# EAGLE board ATTinyX4 (EAGLE 6.3)
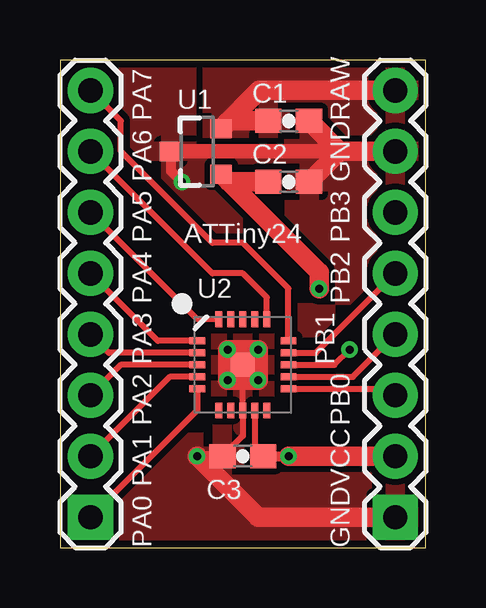
[diagram p0: board, top side]
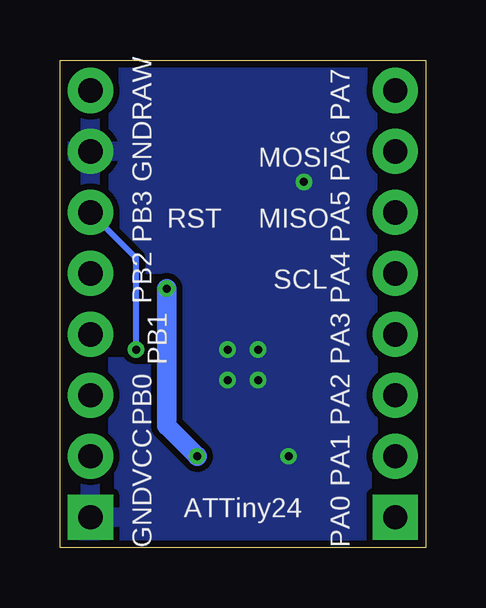
[diagram p1: board, bottom side, seen from below]

Size 15.24 x 20.32 mm. Coordinates in mm from the lower left corner, seen from the top.
Outline: 0,0 15.24,0 15.24,20.32 0,20.32 0,0
Copper layers (1*16): Top 0.0356mm / dielectric 1.5011mm / Bottom 0.0356mm
Design rules "LaenPCBOrder *": minimum track width 6mil, minimum drill 13mil, track to track 6mil, track to pad 6mil, pad to pad 6mil, via to via 6mil, smd to smd 6mil, copper to edge 12mil, drill to drill 6mil, minimum pad ring 7mil, minimum via ring 7mil, stop-mask expansion 4mil, vias tented up to drill 0mil, thermal gap 10mil

## Footprints (pad centres in the part's own frame; a part is rotated, then mirrored left to right if it is on the bottom)
0603-CAP = smd 1.1 x 1: 1 -0.85,0; 2 0.85,0
1X08 = drill 1.016 pad 1.88 square: 1 0,0 | drill 1.016 pad 1.88: 2 2.54,0; 3 5.08,0; 4 7.62,0; 5 10.16,0; 6 12.7,0; 7 15.24,0; 8 17.78,0
SOT23-3 = smd 0.8 x 0.9: 1 -0.95,-1; 2 0.95,-1; 3 0,1.1
QFN20 = smd 1 x 1: 0 0,0 | smd 0.65 x 0.3: 1 -1.9,1; 2 -1.9,0.5; 3 -1.9,0; 4 -1.9,-0.5; 5 -1.9,-1; 11 1.9,-1; 12 1.9,-0.5; 13 1.9,0; 14 1.9,0.5; 15 1.9,1 | smd 0.3 x 0.65: 6 -1,-1.9; 7 -0.5,-1.9; 8 0,-1.9; 9 0.5,-1.9; 10 1,-1.9; 16 1,1.9; 17 0.5,1.9; 18 0,1.9; 19 -0.5,1.9; 20 -1,1.9

## Placement (x,y rotation side)
C1  0.1uF  [0603-CAP]  9.53,17.78 0 top
C2  0.1uF  [0603-CAP]  9.53,15.24 0 top
C3  0.1uF  [0603-CAP]  7.62,3.81 0 top
JP1  HEADER_A  [1X08]  1.27,1.27 90 top
JP2  HEADER_B  [1X08]  13.97,1.27 90 top
U1  LM3480IM4  [SOT23-3]  5.71,16.51 90 top
U2  ATTINY24QFN  [QFN20]  7.62,7.62 0 top

## Library data of the parts
C1-C3 = SparkFun-Capacitors
JP1 JP2 = SparkFun-Connectors
U1 = SparkFun-PowerIC
U2 = SparkFun-DigitalIC

## Nets
GND: C1.2 C2.2 C3.1 JP2.1 JP2.7 U1.3 U2.0 U2.8
PA0: JP1.1 U2.5
PA1: JP1.2 U2.4
PA2: JP1.3 U2.3
PA3: JP1.4 U2.2
PA4: JP1.5 U2.1
PA5: JP1.6 U2.20
PA6: JP1.7 U2.16
PA7: JP1.8 U2.15
PB0: JP2.3 U2.11
PB1: JP2.4 U2.12
PB2: JP2.5 U2.14
PB3: JP2.6 U2.13
RAW: C1.1 JP2.8 U1.2
VCC: C2.1 C3.2 JP2.2 U1.1 U2.9

## Tracks (layer width: path | path; a pad name or v marks a point on that pad's centre or on a via)
GND  (via drill 0.33)
  Top 0.254: C3.1 7.62,4.66 U2.8 U2.0
  Top 0.406: C3.1 v5.71,3.81 | U1.3 4.62,15.71 v5.08,15.24
  Top 0.61: U1.3 11.43,16.51
  Top 0.813: 11.64,16.51 C1.2 | JP2.7 11.64,16.51 | 11.64,16.51 11.54,16.4 | 11.54,16.4 C2.2 | 11.43,16.51 11.54,16.4 | v6.99,8.26 U2.0 | v8.26,8.26 U2.0 | v8.26,6.99 U2.0 | v6.99,6.99 U2.0 | v6.99,8.26 v6.99,6.99 | v6.99,6.99 v8.26,6.99 | v8.26,6.99 v8.26,8.26 | v8.26,8.26 v6.99,8.26 | JP2.1 8.26,1.27 v5.71,3.81
  pour Bottom (isolate 0.254): -1.27,21.59 16.51,21.59 16.51,-1.27 -1.27,-1.27
  pour Top (isolate 0.254, rank 6): -1.27,21.59 16.51,21.59 16.51,-1.27 -1.27,-1.27
PA0
  Top 0.254: U2.5 5.72,5.72 JP1.1
PA1
  Top 0.254: U2.4 4.58,7.12 JP1.2
PA2
  Top 0.254: U2.3 2.54,7.62 JP1.3
PA3
  Top 0.254: U2.2 2.04,8.12 JP1.4
PA4
  Top 0.254: U2.1 4.08,8.62 JP1.5
PA5
  Top 0.254: U2.20 5.72,9.52 JP1.6
PA6
  Top 0.254: U2.16 8.62,10.43 7.62,11.43 6.35,11.43 JP1.7
PA7
  Top 0.254: U2.15 9.52,10.8 7.62,12.7 6.35,12.7 2.54,16.51 2.54,17.78 JP1.8
PB0
  Top 0.254: U2.11 13.7,6.62 JP2.3
PB1
  Top 0.254: U2.12 12.2,7.12 JP2.4
PB2
  Top 0.254: U2.14 10.66,8.12 JP2.5
PB3  (via drill 0.33)
  Top 0.254: U2.13 11.43,7.62 v12.06,8.26
  Bottom 0.254: v12.06,8.26 12.06,12.06 JP2.6
RAW
  Top 0.813: JP2.8 8.3,19.05 U1.2 7.04,17.78 C1.1
  pour Top (isolate 0.254): 6.35,21.59 16.51,21.59 16.51,17.14 6.35,17.14
VCC  (via drill 0.33)
  Top 0.254: U2.9 8.12,4.16 C3.2
  Top 0.406: C3.2 v9.53,3.81
  Top 0.813: C2.1 7.04,15.24 U1.1 10.79,11.48 v10.79,10.79 | JP2.2 v9.53,3.81
  Bottom 0.813: v10.79,10.79 10.79,5.08 v9.53,3.81

## Text on the board
tNames: PA7 | RAW | PA6 | GND | PA5 | ATTiny24 | PB3 | PA4 | PB2 | PA3 | PB1 | PA2 | PB0 | PA1 | VCC | PA0 | GND
bNames: PA7 | RAW | MOSI | PA6 | GND | PA5 | MISO | RST | PB3 | SCL | PA4 | PB2 | PA3 | PB1 | PA2 | PB0 | PA1 | VCC | ATTiny24 | PA0 | GND